# Altium PCB MB1364.PcbDoc (part 2 of 3)
Units mm, origin at the board's own origin, x right, y up, seen from the top; angles counter-clockwise.
Board outline 70 x 133.34 mm, 6 copper layers (Top Layer, Signal Layer 1, Signal Layer 2, Signal Layer 3, Signal Layer 4, Bottom Layer), stack 1.57 mm thick; 66 components, 167 nets, 440 pads, 46 vias.
Unrouted connection lines stored in the file: 1.
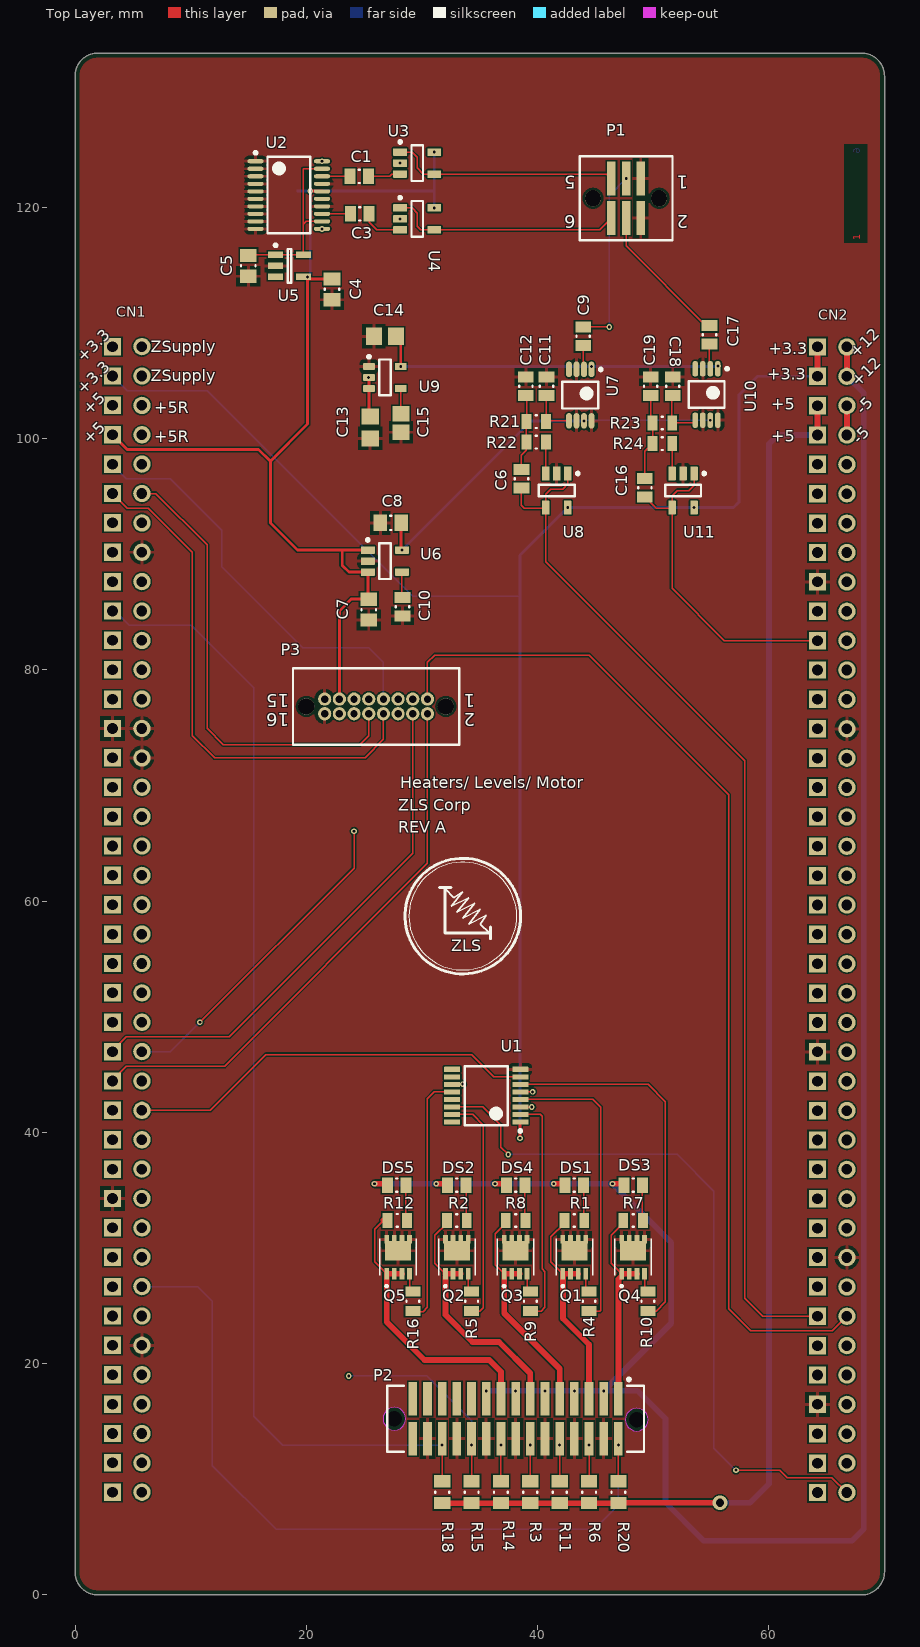
[diagram p0: Top Layer view]

## Part data (continued)
U5: library part CMP-1567-00007-1, "Micropower, 400 mV Reference with Rail-to-Rail Buffer Amplifier, 1.4 to 18 V, 0 to 70 degC, 5-Pin SOT-23 (S5), RoHS, Tape and Reel", Case/Package=SOT-23-5, Manufacturer="Analog Devices / Linear Technology", Max Input Voltage=18V, Max Operating Temperature=70°C, Min Input Voltage=1.4V, Min Operating Temperature=0°C, Output Current=200uA, Output Voltage=400mV, Package Quantity=1, Quiescent Current=15uA, Supplier Part Number 1=LT6650CS5#TRMPBFCT-ND, Temperature Coefficient=30ppm/°C, Temperature Max="70 degC", Temperature Min="0 degC", Tolerance=0.75%, Code_JEDEC=MO-193, ComponentLink1Description="Manufacturer URL", ComponentLink1URL=http://www.linear.com/, ComponentLink2Description=Datasheet, ComponentLink2URL=http://cds.linear.com/docs/en/datasheet/6650fa.pdf, ComponentLink3Description="Package Specification", ComponentLink3URL=http://cds.linear.com/docs/en/packaging/SOT_5_05-08-1635.pdf, ComponentLink4Description=https://datasheet.ciiva.com/6594/1196-6594366.pdf?src-supplier=Digi-Key, ComponentLink4URL=https://datasheet.ciiva.com/6594/1196-6594366.pdf?src-supplier=Digi-Key, ComponentLink5Description=https://datasheet.ciiva.com/48694/001256472-da-01-en-ic-vref-s-lt6650cs5-trmpbf-tsot-23-5-ltc-48694695.pdf?src-supplier=Conrad, ComponentLink5URL=https://datasheet.ciiva.com/48694/001256472-da-01-en-ic-vref-s-lt6650cs5-trmpbf-tsot-23-5-ltc-48694695.pdf?src-supplier=Conrad, Height=0.9mm, Lead Free="Lead Free", Length=2.9mm, Manufacturer Part Number=LT6650CS5#TRMPBF, Mounting Technology="Surface Mount", Number of Channels=1, Number of Pins=5, PackageDescription="5-Pin Plastic Thin Small Out-Line Transistor, Body 1.63 x 2.90 mm, Pitch 0.95 mm", PackageVersion="Rev. B, 06/2010", Packaging="Tape and Reel", Packing="Tape and Reel", PartNumber=LT6650CS5#TRMPBF, Pricing 1="1=3.18000, 25=2.11040, 100=1.74480, 250=1.65756 (USD)", Reference Type=Series, RoHS=TRUE, Stock 1=3771, Supplier 1=Digi-Key, VIN Max="18 V", VIN Min="1.4 V", Width=1.75mm